# Altium PCB HB_mini_testJig_PCB.PcbDoc
Units mm, origin at the board's own origin, x right, y up, seen from the top; angles counter-clockwise.
Board outline 69 x 60.04 mm, 2 copper layers (Top Layer, Bottom Layer), stack 1.571 mm thick; 49 components, 33 nets, 162 pads, 81 vias.
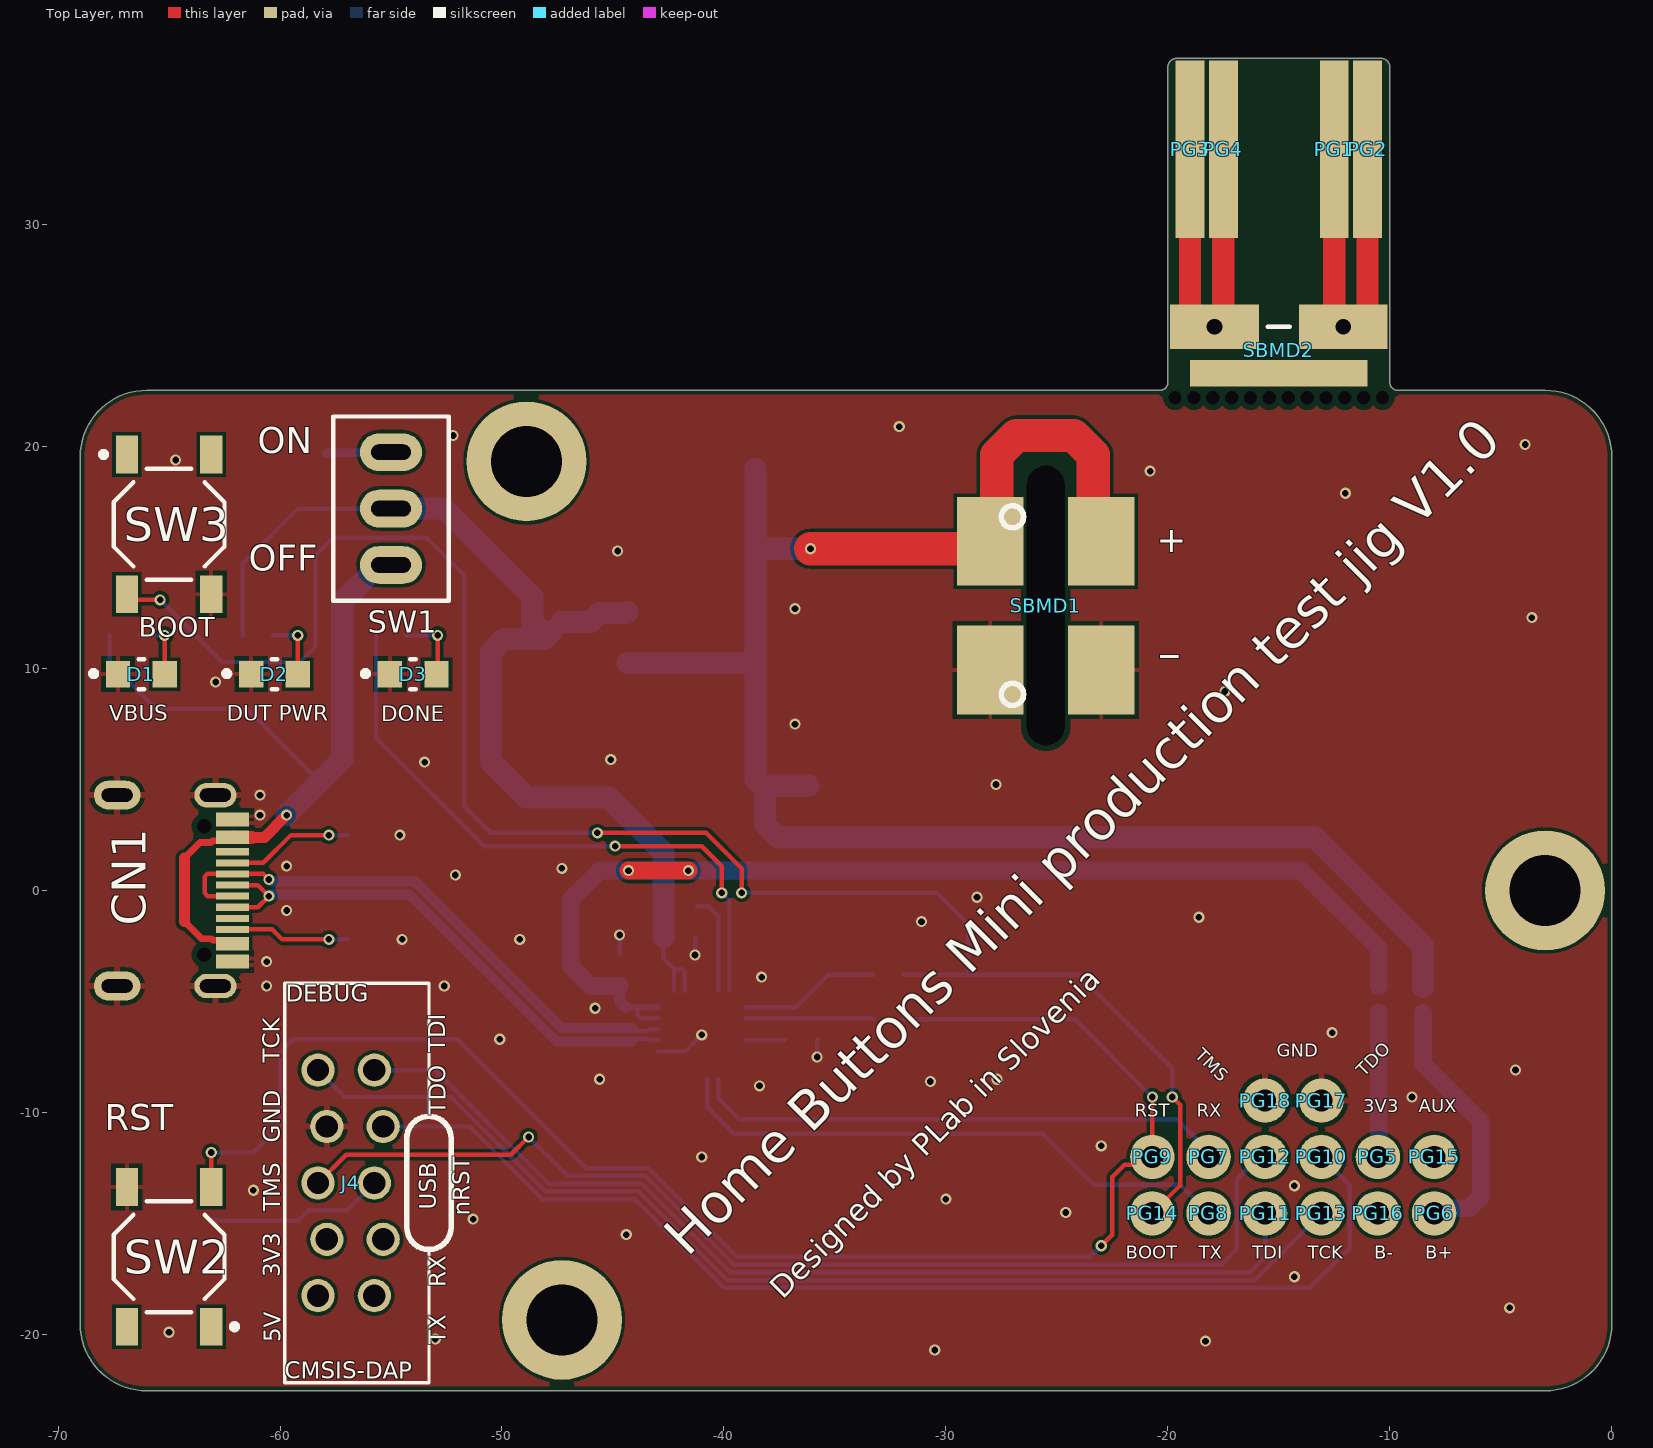
[diagram p0: Top Layer view]
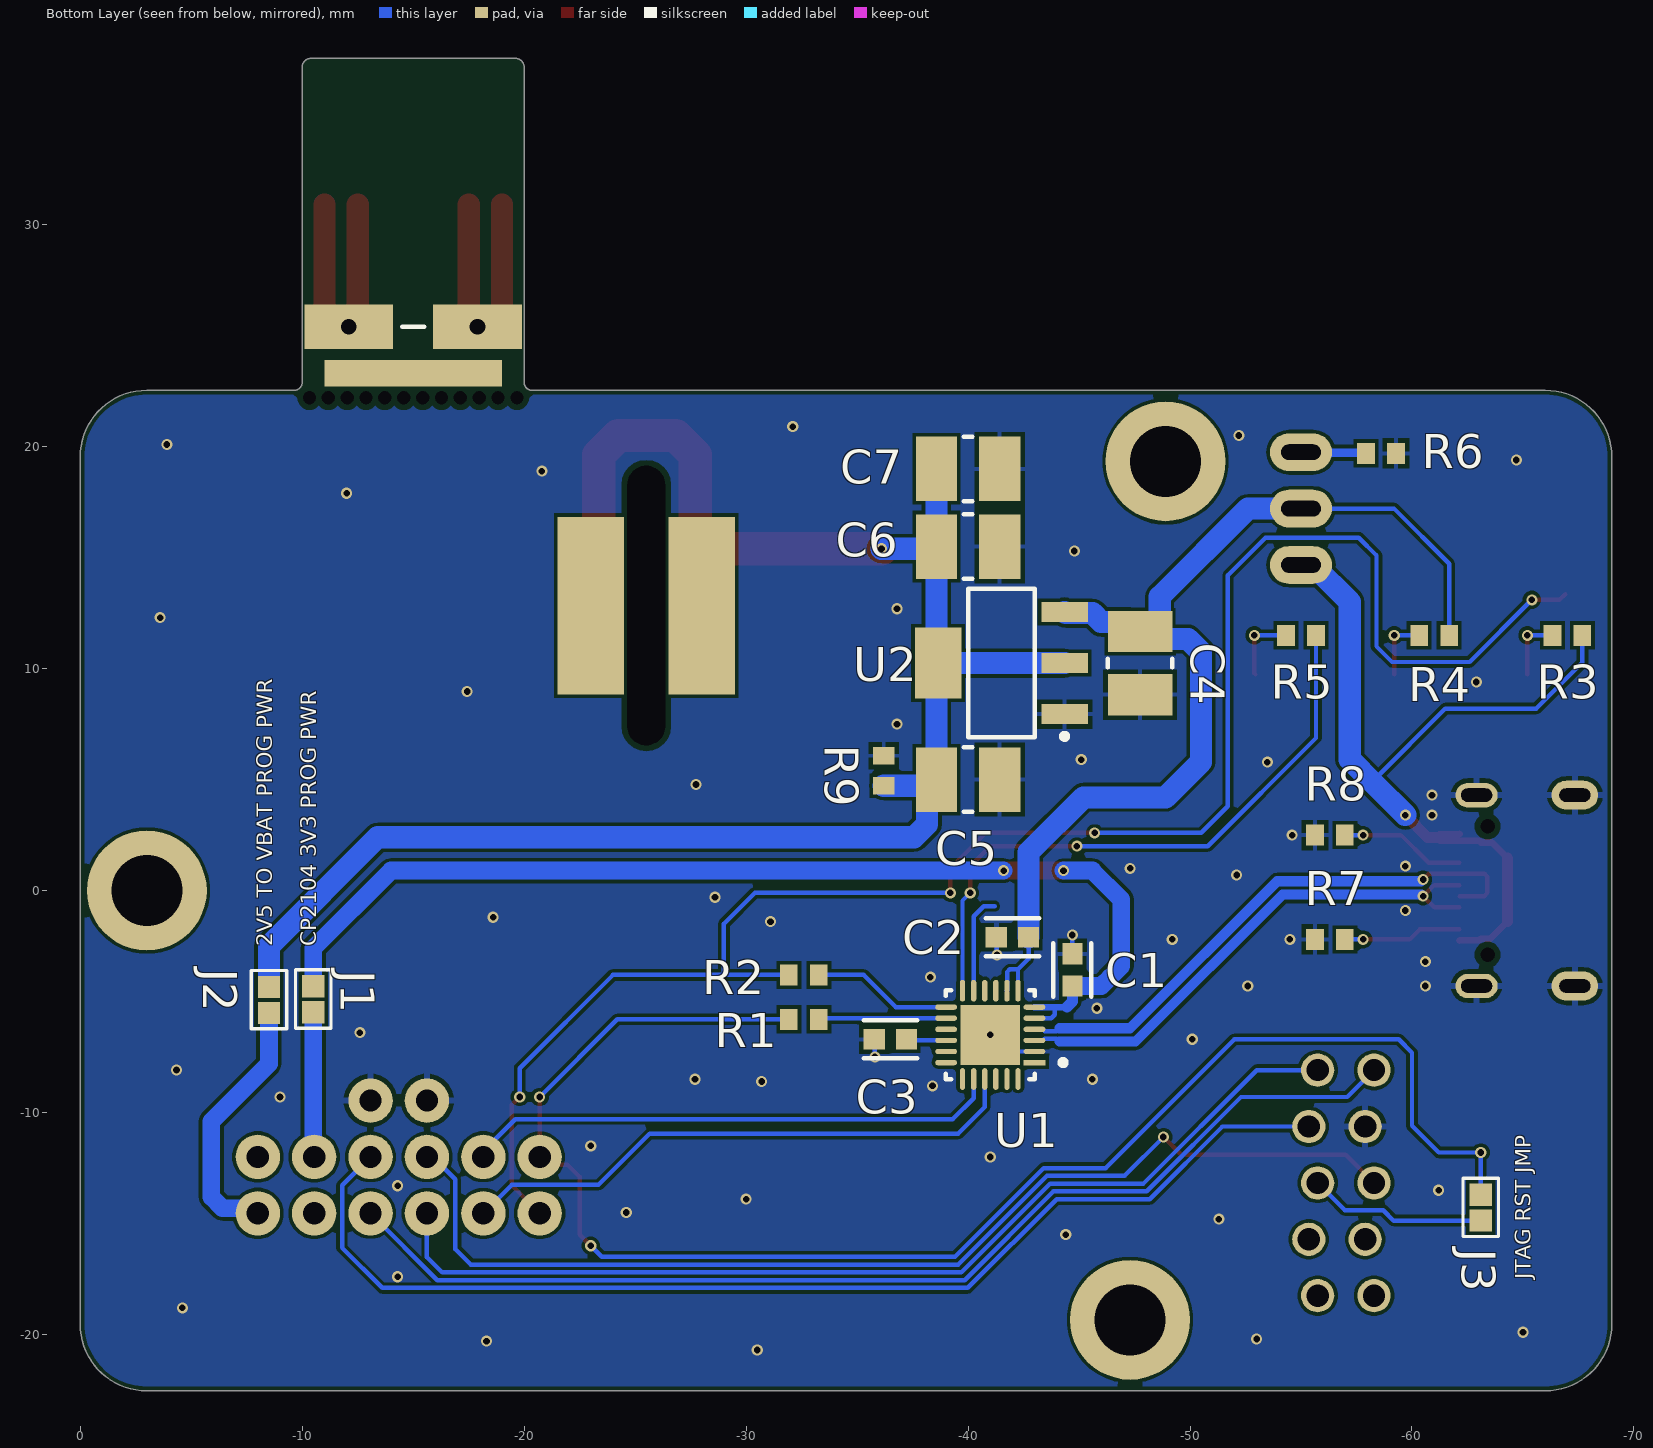
[diagram p1: Bottom Layer view, seen from below]

## Layer stack, top to bottom
Top Solder: solder mask 0.0102, Solder Resist, Dk 3.5
Top Layer: signal copper 0.0356
Dielectric 1: dielectric 1.5, FR-4, Dk 4.8
Bottom Layer: signal copper 0.0356
Bottom Solder: solder mask 0.0102, Solder Resist, Dk 3.5

## Board outline
-66,-22.54 cw(c-66,-19.54) -69,-19.54 -69,19.54 cw(c-66,19.54) -66,22.54 -20.355,22.54 ccw(c-20.355,22.895) -20,22.895 -20,37.099 cw(c-19.6,37.099) -19.6,37.499 -10.4,37.499 -10.4,37.5 cw(c-10.4,37.1) -10,37.1 -10,22.9 ccw(c-9.64,22.9) -9.64,22.54 -3,22.54 cw(c-3,19.54) 0,19.54 0,-19.54 cw(c-3,-19.54) -3,-22.54

## Design rules (kind name [scope] priority, off if disabled: settings)
BoardOutlineClearance [All] p1: gap=0.2 ignorepadtopadclearanceinfootprint=FALSE
Clearance "proximity track clearance" [InNet('PROXIMITY') vs InNet('GND')] p1: gap=1.5 ignorepadtopadclearanceinfootprint=TRUE
Clearance "usb dif pair track clearance" [(InNet('USB_N') OR InNet('USB_P')) vs InNet('GND')] p2: gap=0.5 ignorepadtopadclearanceinfootprint=TRUE
Clearance [All] p3: gap=0.15 ignorepadtopadclearanceinfootprint=FALSE except(0.25: Arc-Hole Track-Hole THPad-Hole Via-Hole Fill-Hole Poly-Hole Region-Hole Text-Hole)
ComponentClearance [All] p1: gap=0 collisioncheckmode=3 verticalgap=0 showdistances=TRUE
DiffPairsRouting [All] p1: maxlimit=0.14 minlimit=0.14 mostfreqgap=0.14 toplayer_minwidth=0.2 toplayer_maxwidth=0.458 toplayer_prefwidth=0.458 bottomlayer_minwidth=0.2 bottomlayer_maxwidth=0.458 bottomlayer_prefwidth=0.458 impedanceprofiledriven=TRUE impedanceprofileid={0EA568FE-A5EC-4DF0-9C7C-A0E0A3EF534C} impedanceprofilevalue=90.000000 maxuncoupledlength=12.7
Height [All] p1: minheight=0 maxheight=1816.048 prefheight=12.7
HoleSize [All] p1: absolutevalues=TRUE maxlimit=6.3 minlimit=0.3 maxpercent=80.000 minpercent=20.000
HoleToHoleClearance [All] p1: gap=0.25 allowstackedmicrovias=FALSE
MinimumAnnularRing [All] p1: minimumring=0.076
MinimumSolderMaskSliver [All] p1: minsoldermaskwidth=0
PasteMaskExpansion [All] p1: expansion=0 percent=-10.000000
PlaneClearance [All] p1: clearance=0.102
PlaneConnect PlaneConnectPowerPads [InPadClass('PowerPads')] p1: planeconnectstyle=Direct reliefexpansion=0.508 reliefentries=4 reliefconductorwidth=0.254 reliefairgap=0.254
PlaneConnect [All] p2: pad.planeconnectstyle=Relief pad.reliefexpansion=0.3 pad.reliefentries=4 pad.reliefconductorwidth=0.102 pad.reliefairgap=0.102 via.planeconnectstyle=Direct via.reliefexpansion=0.3 via.reliefentries=4 via.reliefconductorwidth=0.127 via.reliefairgap=0.127
PolygonConnect PolygonConnectPowerPads [All vs (InPadClass('PowerPads'))] p1: connectstyle=Direct reliefconductorwidth=0.254 reliefentries=4 polygonreliefangle="90 Angle" airgapwidth=0.254
PolygonConnect [All] p2: thpad.connectstyle=Relief thpad.reliefconductorwidth=0.3 thpad.reliefentries=4 thpad.polygonreliefangle="90 Angle" thpad.airgapwidth=0.2 smdpad.connectstyle=Relief smdpad.reliefconductorwidth=0.2 smdpad.reliefentries=4 smdpad.polygonreliefangle="90 Angle" smdpad.airgapwidth=0.2 via.connectstyle=Direct via.reliefconductorwidth=0.127 via.reliefentries=4 via.polygonreliefangle="90 Angle" via.airgapwidth=0.127
RoutingVias [All] p1: holewidth=0.3 width=0.5 viastyle="Through Hole" minholewidth=0.2 minwidth=0.45 maxholewidth=6.3 maxwidth=6.55
SilkToSilkClearance [All] p1: silktosilkclearance=0
SilkToSolderMaskClearance [IsPad] p1: minsilkscreentomaskgap=0.08 clearancetoexposedcopper=TRUE
SolderMaskExpansion SolderMaskExpansion_VIAS [IsVia] p1: expansion=0.102 istentingtop=TRUE // SolderMask expansion for vias (defines tenting)
SolderMaskExpansion [All] p2: expansion=0.102 istentingtop=FALSE
Width [All] p1: maxlimit=1816.048 minlimit=0.09 preferedwidth=0.102 minimp=50.000000 maximp=50.000000 favimp=50.000000
19 further rules are at their usual default settings.

## Classes and differential pairs
differential pair USB_DATA: +USB_DATA_P -USB_DATA_N

## Components (designator, comment, footprint, x,y, rotation, side; value= is the part's Value field where it differs from the comment)
C1 "CL10A105KB8NNNC" FP-CL10B105KO8NNNC-IPC_B -44.7,-3.573 r90 bottom value=1uF
C2 "CL10A105KB8NNNC" FP-CL10B105KO8NNNC-IPC_B -42,-2.1 r0 bottom value=1uF
C3 "CL10A105KB8NNNC" FP-CL10B105KO8NNNC-IPC_B -36.5,-6.7 r0 bottom value=1uF
C4 "CL32A107MQVNNWE" FP-CL32-IPC_A -47.75,10.25 r270 bottom
C5 "CL32A107MQVNNWE" FP-CL32-IPC_A -40,5 r180 bottom
C6 "CL32A107MQVNNWE" FP-CL32-IPC_A -40,15.5 r180 bottom
C7 "CL32A107MQVNNWE" FP-CL32-IPC_A -40,19 r180 bottom
CN1 "XKB U262-161N-4BVC11" "XKB U262-161N-4BVC11" -69.69,0 r270 top
D1 "150080SS75000" FP-150080SS75000-MFG -66.25,9.75 r0 top
D2 "150080SS75000" FP-150080SS75000-MFG -60.25,9.75 r0 top
D3 "150080SS75000" FP-150080SS75000-MFG -54,9.75 r0 top
J1 "SolderJumper" AislerRule_SolderJumper_1mm -10.5,-5.47 r270 bottom
J2 "SolderJumper" AislerRule_SolderJumper_1mm -8.5,-5.5 r270 bottom
J3 "SolderJumper" AislerRule_SolderJumper_1mm -63.1,-14.86 r270 bottom
J4 "DEBUG" "muselab cmsis-dap frictionfit" -58.29,-13.17 r0 top locked
PG1 "POGO pin" "1x16x3mm (diam, total len, travel) pogo pin - HORIZONTAL" -12.5,33.4 r0 top
PG2 "POGO pin" "1x16x3mm (diam, total len, travel) pogo pin - HORIZONTAL" -11,33.4 r0 top
PG3 "POGO pin" "1x16x3mm (diam, total len, travel) pogo pin - HORIZONTAL" -19,33.4 r0 top
PG4 "POGO pin" "1x16x3mm (diam, total len, travel) pogo pin - HORIZONTAL" -17.5,33.4 r0 top
PG5 "POGO pin" "1x16x3mm (diam, total len, travel) pogo pin" -10.54,-12 r0 top locked
PG6 "POGO pin" "1x16x3mm (diam, total len, travel) pogo pin" -8,-14.54 r0 top locked
PG7 "POGO pin" "1x16x3mm (diam, total len, travel) pogo pin" -18.16,-12 r0 top locked
PG8 "POGO pin" "1x16x3mm (diam, total len, travel) pogo pin" -18.16,-14.54 r0 top locked
PG9 "POGO pin" "1x16x3mm (diam, total len, travel) pogo pin" -20.7,-12 r0 top locked
PG10 "POGO pin" "1x16x3mm (diam, total len, travel) pogo pin" -13.08,-12 r90 top locked
PG11 "POGO pin" "1x16x3mm (diam, total len, travel) pogo pin" -15.62,-14.54 r90 top locked
PG12 "POGO pin" "1x16x3mm (diam, total len, travel) pogo pin" -15.62,-12 r90 top locked
PG13 "POGO pin" "1x16x3mm (diam, total len, travel) pogo pin" -13.08,-14.54 r90 top locked
PG14 "POGO pin" "1x16x3mm (diam, total len, travel) pogo pin" -20.7,-14.54 r90 top locked
PG15 "POGO pin" "1x16x3mm (diam, total len, travel) pogo pin" -8,-12 r90 top locked
PG16 "POGO pin" "1x16x3mm (diam, total len, travel) pogo pin" -10.54,-14.54 r90 top locked
PG17 "POGO pin" "1x16x3mm (diam, total len, travel) pogo pin" -13.08,-9.46 r90 top locked
PG18 "POGO pin" "1x16x3mm (diam, total len, travel) pogo pin" -15.62,-9.46 r90 top locked
R1 "0603WAF560JT5E" RESC1608X55X30NL15T15 -32.6,-5.8 r0 bottom value=56
R2 "0603WAF560JT5E" RESC1608X55X30NL15T15 -32.6,-3.8 r0 bottom value=56
R3 "0603WAF5101T5E" RESC1608X55X30NL15T15 -67,11.5 r180 bottom value=5.1k
R4 "0603WAF5101T5E" RESC1608X55X30NL15T15 -61,11.5 r180 bottom value=5.1k
R5 "0603WAF5101T5E" RESC1608X55X30NL15T15 -55,11.5 r180 bottom value=5.1k
R6 "0603WAF5101T5E" RESC1608X55X30NL15T15 -58.6,19.7 r180 bottom value=5k1
R7 "0603WAF5101T5E" RESC1608X55X30NL15T15 -56.3,-2.2 r180 bottom value=5k1
R8 "0603WAF5101T5E" RESC1608X55X30NL15T15 -56.3,2.5 r180 bottom value=5k1
R9 "0603WAF560JT5E" RESC1608X55X30NL15T15 -36.2,5.4 r270 bottom value=56
SBMD1 "vertical module board 4 pin" "vertical submodule board female" -25.5,12.84 r180 top locked
SBMD2 "vertical module board 4 pin" "vertical submodule pcb male" -15,23.5 r90 top
SW1 "SPDT switch" "ST-0-103-A01-T000-RS+PJ toggle switch" -55,17.21 r0 top
SW2 "TS-1187A-B-A-B" ESWI-TL3342F160QG_V -65,-16.5 r180 top locked
SW3 "TS-1187A-B-A-B" ESWI-TL3342F160QG_V -65,16.5 r0 top locked
U1 "CP2104-F03-GMR" FP-CP2104-F03-GMR-IPC_A -41,-6.5 r0 bottom
U2 "LD1117S25TR" SOT-223_L -41.5,10.25 r0 bottom

## Footprints (in the part's own frame and the unit in brackets; to place one, negate y for a bottom-side part, rotate by r counter-clockwise, add the part's x,y. Pads: shape width x height; smd on the part's side, far side on the other; paste and mask are expansions set on the pad)
"1x16x3mm (diam, total len, travel) pogo pin" [mm] "Random Aliexpress pogo pin, 1mm diameter, 16mm extended length, 3mm travel"
  round 2 hole 1: 1(0,0)
  body extent -0.5,-0.5 0.5,0.5, height 14.4
"1x16x3mm (diam, total len, travel) pogo pin - HORIZONTAL" [mm] "Random Aliexpress pogo pin, 1mm diameter, 16mm extended length, 3mm travel"
  rect 1.3x8 smd mask+0: 1(0,0)
  body extent -0.5,-4 0.5,12, height 1
AislerRule_SolderJumper_1mm [mm]
  rect 1x1 smd: 1(-1.16,0) 2(0.01,0)
  silkscreen extent -1.9,-0.8 0.72,0.8
ESWI-TL3342F160QG_V [mm] "SMD, 4-Leads, Body 5x5mm, Pitch 6.3mm"
  rect 1x1.7 smd: 1(-1.9,3.15) 2(-1.9,-3.15) 3(1.9,3.15) 4(1.9,-3.15)
  silkscreen extent -3.07,-2.5 2.5,3.27, body extent -2.5,-2.5 2.5,2.5, height 1.5
FP-150080SS75000-MFG [mm]
  rect 1.1x1.2 smd paste+0 mask+0: 1(-1.05,0) 2(1.05,0)
  silkscreen extent -2.27,-0.67 0.13,0.67, body extent -1,-0.63 1,0.63, height 0.8
FP-CL10B105KO8NNNC-IPC_B [mm]
  rect 0.958x0.912 smd paste+0 mask+0: 1(-0.727,0) 2(0.727,0)
  silkscreen extent -1.21,-0.86 1.21,0.86, body extent -0.8,-0.4 0.8,0.4, height 0.91
FP-CL32-IPC_A [mm]
  rect 1.853x2.904 smd paste+0 mask+0: 1(-1.425,0) 2(1.425,0)
  silkscreen extent -0.2,-1.45 0.2,1.45, body extent -1.6,-1.25 1.6,1.25, height 2.8
FP-CP2104-F03-GMR-IPC_A [mm]
  rect 0.979x0.239 smd paste+0 mask+0: 1(-1.99,1.25)
  rrect100% 0.979x0.239 smd paste+0 mask+0: 2(-1.99,0.75) 3(-1.99,0.25) 4(-1.99,-0.25) 5(-1.99,-0.75) 6(-1.99,-1.25) 13(1.99,-1.25) 14(1.99,-0.75) 15(1.99,-0.25) 16(1.99,0.25) 17(1.99,0.75) 18(1.99,1.25)
  rrect100% 0.239x0.979 smd paste+0 mask+0: 7(-1.25,-1.99) 8(-0.75,-1.99) 9(-0.25,-1.99) 10(0.25,-1.99) 11(0.75,-1.99) 12(1.25,-1.99) 19(1.25,1.99) 20(0.75,1.99) 21(0.25,1.99) 22(-0.25,1.99) 23(-0.75,1.99) 24(-1.25,1.99)
  rect 2.7x2.7 smd paste-1000 mask+0: 25(0,0)
  silkscreen extent -3.4,-2 2,2, body extent -2.01,-2.01 2.01,2.01, height 0.8
"muselab cmsis-dap frictionfit" [mm]
  round 1.5 hole 1: 1(0,5.08) 2(0.4,2.54) 3(0,0) 4(0.4,-2.54) 5(0,-5.08) 6(2.54,-5.08) 7(2.94,-2.54) 8(2.54,0) 9(2.94,2.54) 10(2.54,5.08)
  silkscreen extent -1.5,-9 6,9
RESC1608X55X30NL15T15 [mm] "Chip Resistor, 2-Leads, Body 1.60x0.80mm, IPC Medium Density"
  rect 0.8x0.95 smd: 1(-0.675,0) 2(0.675,0)
  body extent -0.87,-0.48 0.87,0.48, height 0.55
SOT-223_L [mm] "SOT223, 4-Leads, Body 6.5x3.5mm, Pitch 2.3mm, Lead Span 7mm, IPC High Density"
  rect 2.1x0.9 smd: 1(-2.85,2.3) 2(-2.85,0) 3(-2.85,-2.3)
  rect 2.1x3.2 smd: 4(2.85,0)
  silkscreen extent -2.97,-3.35 1.5,3.42, body extent -1.85,-3.35 1.85,3.35, height 1.8
"ST-0-103-A01-T000-RS+PJ toggle switch" [mm] "SPDT toggle switch"
  oval 2.8x1.7 hole 0.7 slot 1.8 at 0 deg: 1(0,2.54) 2(0,0) 3(0,-2.54)
  silkscreen extent -2.6,-4.15 2.6,4.15
"vertical submodule board female" [mm] "for 2x2 right angle raised pogo pins"
  round 0 hole 1.7 slot 12.6 at 90 deg unplated: 0(0,0)
  rect 3x4 smd mask+0: 1(-2.5,2.9) 2(-2.5,-2.9) 3(2.5,-2.9) 4(2.5,2.9)
  rect 3x8 smd far side mask+0: 5(-2.5,0) 6(2.5,0)
"vertical submodule pcb male" [mm] "carrier for 2x2 pogo pins"
  rect 2x4 smd mask+0: 1(1.9,2.9) 2(1.9,-2.9)
  rect 2x4 smd far side mask+0: 3(1.9,-2.9) 4(1.9,2.9)
  rect 1.2x8 smd mask+0: 5(-0.2,0)
  rect 1.2x8 smd far side mask+0: 6(-0.2,0)
"XKB U262-161N-4BVC11" [mm] "USB Type-C connector XKB  U262-161N-4BVC11"
  rect 0.32x1.5 smd mask+0.05: A1(-3.35,7.55) A4(-2.55,7.55) A5(-1.25,7.55) A6(-0.25,7.55) A7(0.25,7.55) A8(1.25,7.55) A9(2.55,7.55) A12(3.35,7.55) B1(3.05,7.55) B4(2.25,7.55) B5(1.75,7.55) B6(0.75,7.55) B7(-0.75,7.55) B8(-1.75,7.55) B9(-2.25,7.55) B12(-3.05,7.55)
  round 0 hole 0.65 unplated mask+0.05: H1(-2.89,6.28) H2(2.89,6.28)
  oval 1.1x1.9 hole 0.6 slot 1.4 at 90 deg mask+0.05: SHELL1(-4.3,6.78) SHELL2(4.3,6.78)
  oval 1.3x2.1 hole 0.6 slot 1.4 at 90 deg mask+0.05: SHELL3(-4.3,2.35) SHELL4(4.3,2.35)
  body extent -4.45,0.05 4.45,7.61, height 3.3

## Part data
C1 C2 C3: library part CMP-2000-06093-2, "CAP CER 1UF 50V X5R 0603", Capacitance=1uF, LCSC=C15849, Manufacturer="Samsung Electro-Mechanics America, Inc", Manufacturer Part Number=CL10B105KO8NNNC, Temperature="-55°C to +125°C", Temperature Characteristic=X5R, Temperature Coefficient=15%, Temperature Range High=+125°C, Temperature Range Low=-55°C, Tolerance=10%, Voltage Rating=50V, Automotive=No, Category=Cap, ComponentLink2Description=Datasheet, ComponentLink2URL=http://www.samsungsem.com/global/front/downloadcms.do?path=%2F%2Fglobal%2F%2Fsupport%2F%2Fproduct-search%2F%2Fmlcc%2F%2F__icsFiles%2F%2Fafieldfile%2F%2F2019%2F%2F06%2F%2F18&fileName=CL10B105KO8NNNC-19.pdf, Device Class L1="Passive Components", Device Class L2=Capacitors, Device Class L3="Ceramic Capacitors", Digikey Description="CAP CER 1UF 16V X7R 0603", Height=0.9mm, Ipc Land Pattern Name=CAPC16080X80, Lead Free=Yes, Material=Ceramic, Octopart=https://octopart.com/cl10b105ko8nnnc-samsung-19018973, Package=CL10B105KO8NNNC, ROHS=TRUE
C4 C5 C6 C7: library part CMP-13271-000832-1, "Cap Ceramic 100uF 6.3V X5R ±20% SMD 1210 +85°C Embossed T/R", Capacitance=100uF, Case Code (Imperial)=1210, Case Code (Metric)=3225, Dielectric=X5R, LCSC=C15008, Max Operating Temperature=85°C, Min Operating Temperature=-55°C, Package Quantity=1, Tolerance=20%, Voltage Rating=6.3V, Case/Package=1210, Contact Plating=Tin, Length=0.126inch, Mount="Surface Mount", Packaging="Cut Tape", Termination=Wraparound, Thickness=0.11inch, Width=0.098inch
CN1: "USB Type-C connector, USB-2.0, 16 pins", LCSC=C319148
D1: library part CMP-1426-00010-2, "LED RED CLEAR 0805 SMD", Case Code (Imperial)=0805, Case Code (Metric)=2012, Color=Blue, Forward Current=30mA, Forward Voltage=1.9V, Lens Color=Colorless, Max Operating Temperature=85°C, Min Operating Temperature=-40°C, Package Quantity=1, Test Current=20mA, Case/Package=0805, Dominant Wavelength=630nm, Height=0.8mm, Length=2mm, Lens Size=1.25mm, Lens Style=Clear, Lens Transparency=Clear, Luminous Intensity=60mcd, Mount="Surface Mount", Packaging="Cut Tape", RoHS Compliant=Yes, Series=WL-SMCW, Viewing Angle=140°, Wavelength=630nm, Width=1.25mm
D2: library part CMP-1426-00010-2, "LED RED CLEAR 0805 SMD", Case Code (Imperial)=0805, Case Code (Metric)=2012, Color=Red, Forward Current=30mA, Forward Voltage=1.9V, Lens Color=Colorless, Max Operating Temperature=85°C, Min Operating Temperature=-40°C, Package Quantity=1, Test Current=20mA, Case/Package=0805, Dominant Wavelength=630nm, Height=0.8mm, Length=2mm, Lens Size=1.25mm, Lens Style=Clear, Lens Transparency=Clear, Luminous Intensity=60mcd, Mount="Surface Mount", Packaging="Cut Tape", RoHS Compliant=Yes, Series=WL-SMCW, Viewing Angle=140°, Wavelength=630nm, Width=1.25mm
D3: library part CMP-1426-00010-2, "LED RED CLEAR 0805 SMD", Case Code (Imperial)=0805, Case Code (Metric)=2012, Color=Green, Forward Current=30mA, Forward Voltage=1.9V, Lens Color=Colorless, Max Operating Temperature=85°C, Min Operating Temperature=-40°C, Package Quantity=1, Test Current=20mA, Case/Package=0805, Dominant Wavelength=630nm, Height=0.8mm, Length=2mm, Lens Size=1.25mm, Lens Style=Clear, Lens Transparency=Clear, Luminous Intensity=60mcd, Mount="Surface Mount", Packaging="Cut Tape", RoHS Compliant=Yes, Series=WL-SMCW, Viewing Angle=140°, Wavelength=630nm, Width=1.25mm
J4: library part "MuseLab CMSIS-DAP probe receiving connector"
PG1 PG2 PG3 PG4 PG5 PG6 PG7 PG8 PG9 PG10 PG11 PG12 PG13 PG14 PG15 PG16 PG17 PG18: "Random Aliexpress pogo pin, 1mm diameter, 16mm extended length, 3mm travel"
R1 R2 R9: library part CMP-2000-00540-1, LCSC=C25196, Manufacturer=UNI_ROYAL, Part Number=0603WAF5101T5E
R3 R4 R5 R6 R7 R8: library part CMP-2000-00540-1, LCSC=C23186, Manufacturer=UNI_ROYAL, Part Number=0603WAF5101T5E
SW1: LCSC=C1788488
SW2 SW3: library part CMP-1696-00003-1, "XKB TS-1187A-B-A-B C318884", LCSC=C318884
U1: library part CMP-08107-000004-1, "IC SGL USB-TO-UART BRIDGE 24QFN", Ambient Temperature Range High=+125°C, Ambient Temperature Range Low=-55°C, LCSC=C47742, Manufacturer="Silicon Laboratories", Max Supply Voltage=3.6V, Min Supply Voltage=1.8V, Nominal Supply Current=100-17000uA, Temperature="-40°C to +85°C", Temperature Range High=+85°C, Temperature Range Low=-40°C, Automotive=No, Category=IC, ComponentLink2Description=Datasheet, ComponentLink2URL=https://www.silabs.com/documents/public/data-sheets/cp2104.pdf, Device Class L1="Integrated Circuits (ICs)", Device Class L2="Interface ICs", Device Class L3=Controllers, Digikey Description="IC SGL USB-TO-UART BRIDGE 24QFN", Height=0.8mm, Interface=UART,USB, Ipc Land Pattern Name=QFN50P400X400X75-24, Lead Free=Yes, Manufacturer Part Number=CP2104-F03-GMR, Mouser Description="I/O Controller Interface IC USB to UART bridge", Octopart=https://octopart.com/cp2104-f03-gmr-silicon+labs-19668642, Package=CP2104-F03-GMR, ROHS=TRUE, Standoff Height=0mm
U2: library part CMP-0244-00306-1, "Fixed Low Drop Positive Voltage Regulator, 4-Pin SOT-223, Tape and Reel", LCSC=C26457, ComponentLink1Description="Manufacturer URL", ComponentLink1URL=http://www.st.com, ComponentLink2Description=Datasheet, ComponentLink2URL=http://www.st.com/internet/com/TECHNICAL_RESOURCES/TECHNICAL_LITERATURE/DATASHEET/CD00000544.pdf, DatasheetVersion=1/11/2011, PackageDescription="4-Pin SOT-223 Package, 6.5 x 3.5 mm Body, 2.3 mm Pitch, 7 mm Lead Span", PackageReference=SOT-223, PackageVersion=2010

## Free pads (board coordinates)
  round 0 hole 0.6 unplated mask+0: BITE0(-19.675,22.2) BITE0(-18.825,22.2) BITE0(-17.975,22.2) BITE0(-17.125,22.2) BITE0(-16.275,22.2) BITE0(-15.425,22.2) BITE0(-14.575,22.2) BITE0(-13.725,22.2) BITE0(-12.875,22.2) BITE0(-12.025,22.2) BITE0(-11.175,22.2) BITE0(-10.325,22.2)
  round 5.4 hole 3.2 unplated mask+0: HOLE0(-3,0) HOLE1(-48.9,19.34) HOLE2(-47.3,-19.34)

## Via types
v1: diameter 0.5, hole 0.3, Top Layer to Bottom Layer, tented both sides, 79 vias
v2: diameter 1.27, hole 0.711, Top Layer to Bottom Layer, tented both sides, 2 vias

## Nets (pads, with @x,y where several pads share a name; then routed paths per layer and width w, separated by ;. In a path a pad name is that pad's centre, name@x,y a point inside that pad or via, vN(x,y) a via of type N, cw(c..) or ccw(c..) an arc to the next point about the centre after c; other vN are vias at no path point)
+2V5: C5.1 C6.1 C7.1 J2.1 R9.2 SBMD1.2 SBMD1.3 U2.2 U2.4 | length 82.2
  Top Layer w1.5: v1(-36.1,15.4) -28,15.4 -27.703,15.697 -27.703,19.621 -26.824,20.5 -24.24,20.5 -23.361,19.621 -23.361,15.761 SBMD1.2@-23,15.4
  Bottom Layer w1: U2.2 U2.4 ; C7.1 C6.1 ; R9.2 -38.148,4.725 C5.1@-38.148,4.574 ; v1(-36.1,15.4) -38.475,15.4 C6.1 ; J2.1 -8.5,-2.5 -13.4,2.4 -37.563,2.4 -38.148,2.986 C5.1@-38.148,4.574 ; C6.1 -38.575,10.25 C5.1 C5.1@-38.148,4.574
+3V3: C1.1 J1.1 U1.5 U1.6 | length 49.5
  Top Layer w0.8: v1(-44.3,0.9) v1(-41.6,0.9)
  Bottom Layer w0.2: -43.9,-5.25 -43.9,-5.6 -43.75,-5.75 U1.5
  Bottom Layer w0.3: -44.45,-5.25 -43.9,-5.25 U1.6
  Bottom Layer w0.5: C1.1 -44.7,-5 -44.45,-5.25
  Bottom Layer w0.8: C1.1 -46,-4.3 -46.4,-3.9 -46.9,-3.4 -46.9,-0.4 -45.6,0.9 v1(-44.3,0.9) ; v1(-41.6,0.9) -14,0.9 -10.5,-2.6 J1.1
+5V: C2.1 C4.1 R4.2 SW1.2 U1.7 U1.8 U2.3 | length 49.7
  Bottom Layer w0.2: R4.2 -61.675,14.725 -59.19,17.21 SW1.2 ; C2.1 -42.727,-3.073 -42.25,-3.55 ; U1.7 -42.25,-3.55 ; U1.8 -41.758,-4.503 -41.758,-3.667 -41.875,-3.55 -42.25,-3.55
  Bottom Layer w1: SW1.2 -52.61,17.21 -48.635,13.235 -48.635,12.102 -48.209,11.675 C4.1 -48.085,11.34 -49.914,11.34 -50.5,10.754 -50.5,5.8 -48.9,4.2 -45.2,4.2 -42.727,1.727 C2.1 ; C4.1@-47.324,12.102 -45.998,12.102 -45.6,12.5 -44.4,12.5 U2.3
CP_GPIO_0: R1.1 U1.14 | length 5.8
  Bottom Layer w0.2: U1.14 -33.325,-5.75 R1.1
CP_GPIO_1: R2.1 U1.13 | length 6.3
  Bottom Layer w0.2: U1.13 -36.75,-5.25 -35.3,-3.8 R2.1
CP_GPIO_2: R5.2 U1.12 | length 28.3
  Top Layer w0.2: v1(-44.9,2) -41,2 -40.1,1.1 v1(-40.1,-0.1)
  Bottom Layer w0.2: R5.2 -55.675,6.875 -50.8,2 v1(-44.9,2) ; v1(-40.1,-0.1) -39.75,-0.45 U1.12
CP_GPIO_3: U1.11 | length 4.5
  Bottom Layer w0.2: -41.2,-0.7 -40.7,-0.7 -40.25,-1.15 U1.11
DUT_3v3: J1.2 PG5.1 | length 6.5
  Bottom Layer w0.8: PG5.1@-10.5,-11.96 J1.2
DUT_AUX: PG15.1
DUT_BAT_NEG: PG16.1
DUT_BAT_POS: J2.2 PG6.1 | length 11.8
  Bottom Layer w0.8: J2.2 -8.5,-7.8 -5.9,-10.4 -5.9,-13.8 -6.41,-14.31 -7.77,-14.31 PG6.1
DUT_GND: C1.2 C2.2 C3.2 C4.2 C5.2 C6.2 C7.2 CN1.A1 CN1.A12 CN1.B1 CN1.B12 CN1.SHELL1 CN1.SHELL2 CN1.SHELL3 CN1.SHELL4 D1.1 D2.1 D3.1 J4.2 PG17.1 PG18.1 R6.2 R7.1 R8.1 R9.1 SBMD1.1 SBMD1.4 SW2.4 SW3.4 U1.2 U1.25 U2.1 | length 4.8
  Bottom Layer w0.2: C1.2 v1(-44.7,-2) ; U1.2 -41.75,-7.25 v1(-41,-6.5) ; v1(-41.3,-2.9) -41.3,-2.127 C2.2 ; v1(-35.8,-7.5) -35.8,-6.727 C3.2
  other v1: -30.5,-20.7 -18.3,-20.3 -53,-20.2 -65,-19.9 -4.6,-18.8 -14.3,-17.4 -44.4,-15.5 -51.3,-14.8 -24.6,-14.5 -30,-13.9 -61.2,-13.5 -14.3,-13.3 -41,-12 -23,-11.5 -9,-9.3 -38.4,-8.8 -30.7,-8.6 -45.6,-8.5 -27.7,-8.5 -4.336,-8.082 -50.1,-6.7 -12.6,-6.4 -45.8,-5.3 -60.6,-4.3 -52.6,-4.3 -38.3,-3.9 -60.6,-3.2 -54.5,-2.2 -49.2,-2.2 -31.1,-1.4 -18.6,-1.2 -59.7,-0.9 -28.6,-0.3 -52.1,0.7 -47.3,1 -59.7,1.1 -54.6,2.5 -60.9,3.4 -60.9,4.3 -27.74,4.776 -53.485,5.786 -45.1,5.9 -36.8,7.5 -17.434,8.967 -62.9,9.4 -3.6,12.3 -36.8,12.7 -44.789,15.301 -12,17.9 -20.8,18.9 -64.7,19.4 -3.9,20.1 -52.2,20.5 -32.1,20.9
DUT_IO0_BOOT: PG14.1 R2.2 SW3.2 | length 81.2
  Top Layer w0.2: SW3.2 -66.65,13.1 v1(-65.4,13.1) ; v1(-45.7,2.6) -40.805,2.6 -39.2,0.995 v1(-39.2,-0.1) ; PG14.1 -19.45,-13.29 -19.45,-9.65 v1(-19.8,-9.3)
  Bottom Layer w0.2: v1(-65.4,13.1) -62.6,10.3 -59.1,10.3 -58.4,11 -58.4,15.1 -57.6,15.9 -53.4,15.9 -51.7,14.2 -51.7,3.8 -50.5,2.6 v1(-45.7,2.6) ; v1(-39.2,-0.1) -30.4,-0.1 -29,-1.5 -29,-3.8 ; R2.2 -29,-3.8 ; v1(-19.8,-9.3) -19.8,-8 -24,-3.8 -29,-3.8
DUT_RST: J3.1 PG9.1 R1.2 SW2.2 | length 72.7
  Top Layer w0.2: SW2.2 v1(-63.1,-11.8) ; v1(-23,-16) -22.5,-15.5 -22.5,-12.9 -21.944,-12.344 -21.044,-12.344 PG9.1 v1(-20.7,-9.3)
  Bottom Layer w0.2: J3.1 v1(-63.1,-11.8) -61.2,-11.8 -60,-10.6 -60,-7.3 -59.4,-6.7 -52,-6.7 -46.2,-12.5 -43.41,-12.5 -39.41,-16.5 -23.5,-16.5 v1(-23,-16) ; R1.2 -24.2,-5.8 v1(-20.7,-9.3)
DUT_RX: PG7.1 U1.20 | length 24.2
  Bottom Layer w0.2: U1.20 -40.25,-9.35 -39.3,-10.3 -19.6,-10.3 -18.16,-11.74 PG7.1
DUT_TCK: J4.1 PG13.1 | length 50.4
  Bottom Layer w0.2: J4.1 -57.08,-9.3 -52.295,-9.3 -48.045,-13.55 -43.845,-13.55 -39.845,-17.55 -16.09,-17.55 PG13.1
DUT_TDI: J4.10 PG11.1 | length 46.2
  Bottom Layer w0.2: J4.10 -53.01,-8.09 -47.9,-13.2 -43.7,-13.2 -39.7,-17.2 -16.3,-17.2 -15.62,-16.52 PG11.1
DUT_TDO: J4.9 PG10.1 | length 51.9
  Bottom Layer w0.2: J4.9 -51.46,-10.63 -48.19,-13.9 -43.99,-13.9 -39.99,-17.9 -13.6,-17.9 -11.8,-16.1 -11.8,-13.28 PG10.1
DUT_TMS: J4.3 PG12.1 | length 49.8
  Top Layer w0.2: J4.3 -57.02,-11.9 -49.6,-11.9 v1(-48.8,-11.1)
  Bottom Layer w0.2: v1(-48.8,-11.1) -47.05,-12.85 -43.555,-12.85 -39.555,-16.85 -17.6,-16.85 -16.9,-16.15 -16.9,-13 -15.9,-12 PG12.1
DUT_TX: PG8.1 U1.21 | length 25.8
  Bottom Layer w0.2: U1.21 -40.75,-9.75 -39.55,-10.95 -25.65,-10.95 -23.35,-13.25 -19.45,-13.25 PG8.1
NetC3_1: C3.1 U1.16 | length 1.8
  Bottom Layer w0.2: U1.16 -37.277,-6.75 C3.1
NetCN1_A5: CN1.A5 R8.2 | length 5.7
  Top Layer w0.2: CN1.A5 -60.75,1.25 -59.5,2.5 v1(-57.8,2.5)
  Bottom Layer w0.2: v1(-57.8,2.5) R8.2
NetCN1_B5: CN1.B5 R7.2 | length 5.4
  Top Layer w0.2: CN1.B5 -60.35,-1.75 -59.9,-2.2 v1(-57.8,-2.2)
  Bottom Layer w0.2: v1(-57.8,-2.2) R7.2
NetD1_2: D1.2 R3.1 | length 2.9
  Top Layer w0.2: D1.2 v1(-65.2,11.5)
  Bottom Layer w0.2: R3.1 v1(-65.2,11.5)
NetD2_2: D2.2 R4.1 | length 2.9
  Top Layer w0.2: D2.2 v1(-59.2,11.5)
  Bottom Layer w0.2: R4.1 v1(-59.2,11.5)
NetD3_2: D3.2 R5.1 | length 3.2
  Top Layer w0.2: D3.2 -52.9,9.8 v1(-52.9,11.5)
  Bottom Layer w0.2: R5.1 v1(-52.9,11.5)
NetJ3_2: J3.2 J4.8 | length 8.1
  Bottom Layer w0.2: J3.2 -59.17,-14.87 -58.7,-14.4 -56.98,-14.4 J4.8
NetPG1_1: PG1.1 PG2.1 SBMD2.2 SBMD2.3 | length 12
  Top Layer w1: PG1.1@-12.5,30.9 -12.5,25.8 v2(-12.1,25.4) -11.5,25.4 -11,25.9 PG2.1@-11,30.9
NetPG3_1: PG3.1 PG4.1 SBMD2.1 SBMD2.4 | length 12
  Top Layer w1: PG3.1@-19,30.9 -19,25.9 -18.5,25.4 v2(-17.9,25.4) -17.5,25.8 PG4.1@-17.5,30.9
NetR6_1: R6.1 SW1.1 | length 2.9
  Bottom Layer w0.4: R6.1 -57.9,19.725 -55.025,19.725 SW1.1
USB_DATA_N: CN1.A7 CN1.B7 U1.4 | length 25.5
  Top Layer w0.2: CN1.A7 -63.25,-0.25 -63.4,-0.1 -63.4,0.633 -63.283,0.75 CN1.B7 -60.75,0.75 v1(-60.5,0.5)
  Bottom Layer w0.2: -44.129,-6.201 -44,-6.33 -43.45,-6.33 -43.37,-6.25 U1.4
  Bottom Layer w0.458: v1(-60.5,0.5) -60.47,0.5 -60.394,0.424 -53.924,0.424 -47.299,-6.201 -44.129,-6.201
USB_DATA_P: CN1.A6 CN1.B6 U1.3 | length 24.1
  Top Layer w0.2: CN1.B6 -61,-0.75 v1(-60.5,-0.25) -61,0.25 CN1.A6
  Bottom Layer w0.2: -44.129,-6.799 -44,-6.67 -43.45,-6.67 -43.37,-6.75 U1.3
  Bottom Layer w0.458: v1(-60.5,-0.25) -60.424,-0.174 -54.172,-0.174 -47.547,-6.799 -44.129,-6.799
VBUS: CN1.A4 CN1.A9 CN1.B4 CN1.B9 R3.2 SW1.3 | length 38.4
  Top Layer w0.3: -64.3,-1.4 -63.535,-2.165 -63.11,-2.165 -63.035,-2.24 -62.15,-2.24 CN1.B4 ; -64.3,1.465 -63.6,2.165 -63.11,2.165 -63.035,2.24 -62.15,2.24 CN1.B9 -62.13,2.26 -61.24,2.26 -61.1,2.4 -61.24,2.54 -62.13,2.54 CN1.A4
  Top Layer w0.5: -64.3,-1.4 -64.3,1.465 ; -61.1,2.4 -60.7,2.4 v1(-59.7,3.4)
  Bottom Layer w0.2: R3.2 -67.675,10.275 -65.6,8.2 -61.5,8.2 -58.3,5 -58.3,4.8
  Bottom Layer w1: v1(-59.7,3.4) -58.3,4.8 -57.2,5.9 -57.2,12.997 -55.527,14.67 SW1.3
pads on no net: CN1.A8 CN1.B8 CN1.H1 CN1.H2 J4.4 J4.5 J4.6 J4.7 SBMD1.0 SBMD1.5 SBMD1.6 SBMD2.5 SBMD2.6 SW2.1 SW2.3 SW3.1 SW3.3 U1.1 U1.9 U1.10 U1.15 U1.17 U1.18 U1.19 U1.22 U1.23 U1.24

## Polygon pours and split planes (outlines as drawn)
DUT_GND on Top Layer "top gnd pour" (solid, remove dead copper, pour order 0): -66,-22.54 cw(c-66,-19.54) -69,-19.54 -69,19.54 cw(c-66,19.54) -66,22.54 -20.355,22.54 ccw(c-20.355,22.895) -20,22.895 -20,34.9 cw(c-19.6,34.9) -19.6,35.3 -10.4,35.3 cw(c-10.4,34.9) -10,34.9 -10,22.9 ccw(c-9.64,22.9) -9.64,22.54 -3,22.54 cw(c-3,19.54) 0,19.54 0,-19.54 cw(c-3,-19.54) -3,-22.54
DUT_GND on Bottom Layer "bottom gnd pour" (solid, remove dead copper, pour order 1): -66,-22.54 cw(c-66,-19.54) -69,-19.54 -69,19.54 cw(c-66,19.54) -66,22.54 -20.355,22.54 ccw(c-20.355,22.895) -20,22.895 -20,34.9 cw(c-19.6,34.9) -19.6,35.3 -10.4,35.3 cw(c-10.4,34.9) -10,34.9 -10,22.9 ccw(c-9.64,22.9) -9.64,22.54 -3,22.54 cw(c-3,19.54) 0,19.54 0,-19.54 cw(c-3,-19.54) -3,-22.54

## Silkscreen, mask and mechanical layers (free items; w line width, h text height)
Top Overlay:
  circle w0.254: c-27,16.84 r0.5
  circle w0.254: c-27,8.84 r0.5
  lines w0.2: -15.5,25.4 -14.5,25.4
  text "ON" at -61,19.317 h2
  text "+" at -20.5,14.871 h2
  text "OFF" at -61.4,14.017 h2
  text "BOOT" at -66.375,11.138 h1.5
  text "-" at -20.5,8.979 h4
  text "VBUS" at -67.7,7.41 h1.2
  text "DUT PWR" at -62.4,7.41 h1.2
  text "DONE" at -55.43,7.385 h1.2
  text "TMS" at -18.97,-7.594 h1 r315
  text "GND" at -15.1,-7.691 h1
  text "TDO" at -11.006,-8.57 h1 r45
  text "3V3" at -11.2,-10.191 h1
  text "AUX" at -8.7,-10.191 h1
  text "RST" at -21.5,-10.391 h1
  text "RX" at -18.7,-10.4 h1
  text "RST" at -67.9,-11.183 h2
  text "BOOT" at -21.9,-16.791 h1
  text "TX" at -18.6,-16.8 h1
  text "TDI" at -16.2,-16.8 h1
  text "TCK" at -13.7,-16.791 h1
  text "B-" at -10.7,-16.8 h1
  text "B+" at -8.4,-16.8 h1
  text "Home Buttons Mini production test jig V1.0" at -41.217,-16.976 h3 r45
  text "Designed by PLab in Slovenia" at -37.348,-18.448 h1 r45
Bottom Overlay:
  lines w0.2: -15.5,25.4 -14.5,25.4
  text "CP2104 3V3 PROG PWR" at -10.89,-2.5 h1.2 r270
  text "2V5 TO VBAT PROG PWR" at -8.89,-2.5 h1.2 r270
  text "JTAG RST JMP" at -65.59,-17.5 h1.2 r270
PCB Outline layer:
  the board outline again, w0.069

## Text inside footprints (layer, text, board x,y; h text height)
J4: Top Overlay "TDO" at -52.285,-10.109 h1.3 r90; Top Overlay "RX" at -52.283,-17.875 h1.3 r90; Top Overlay "TX" at -52.283,-20.449 h1.3 r90; Top Overlay "TDI" at -52.308,-7.288 h1.3 r90; Top Overlay "5V" at -59.721,-20.343 h1.3 r90; Top Overlay "3V3" at -59.735,-17.43 h1.3 r90; Top Overlay "TMS" at -59.735,-14.438 h1.3 r90; Top Overlay "GND" at -59.735,-11.351 h1.3 r90; Top Overlay "TCK" at -59.76,-7.756 h1.3 r90; Top Overlay "USB" at -52.71,-14.387 h1.3 r90; Top Overlay "CMSIS-DAP" at -59.78,-22.25 h1.3; Top Overlay "nRST" at -51.21,-14.657 h1.3 r90